# Altium PCB Styx plus panele.PcbDoc
Units mm, origin at the board's own origin, x right, y up, seen from the top; angles counter-clockwise.
Board outline 201.2 x 144 mm, 4 copper layers (Top Layer, Mid-Layer 1, Mid-Layer 2, Bottom Layer); 1 components, 0 nets, 3 pads, 0 vias.
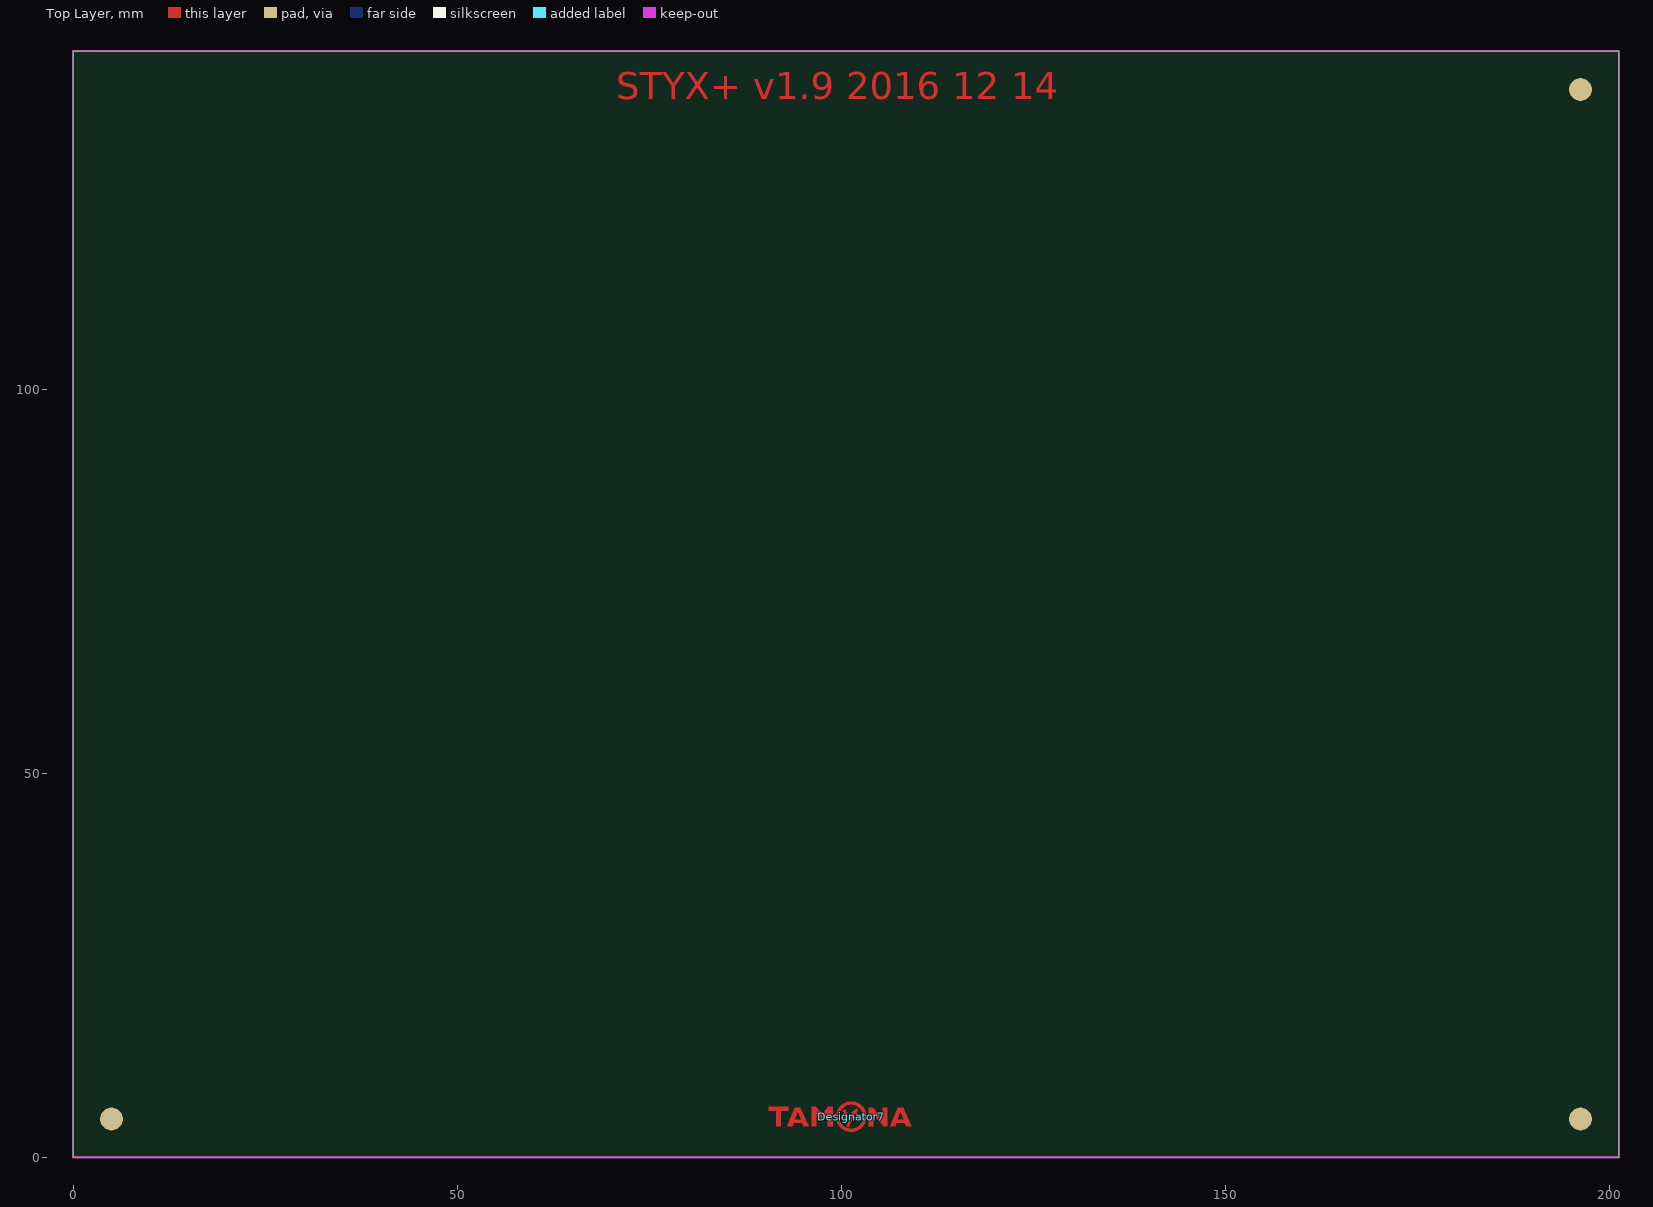
[diagram p0: Top Layer view]
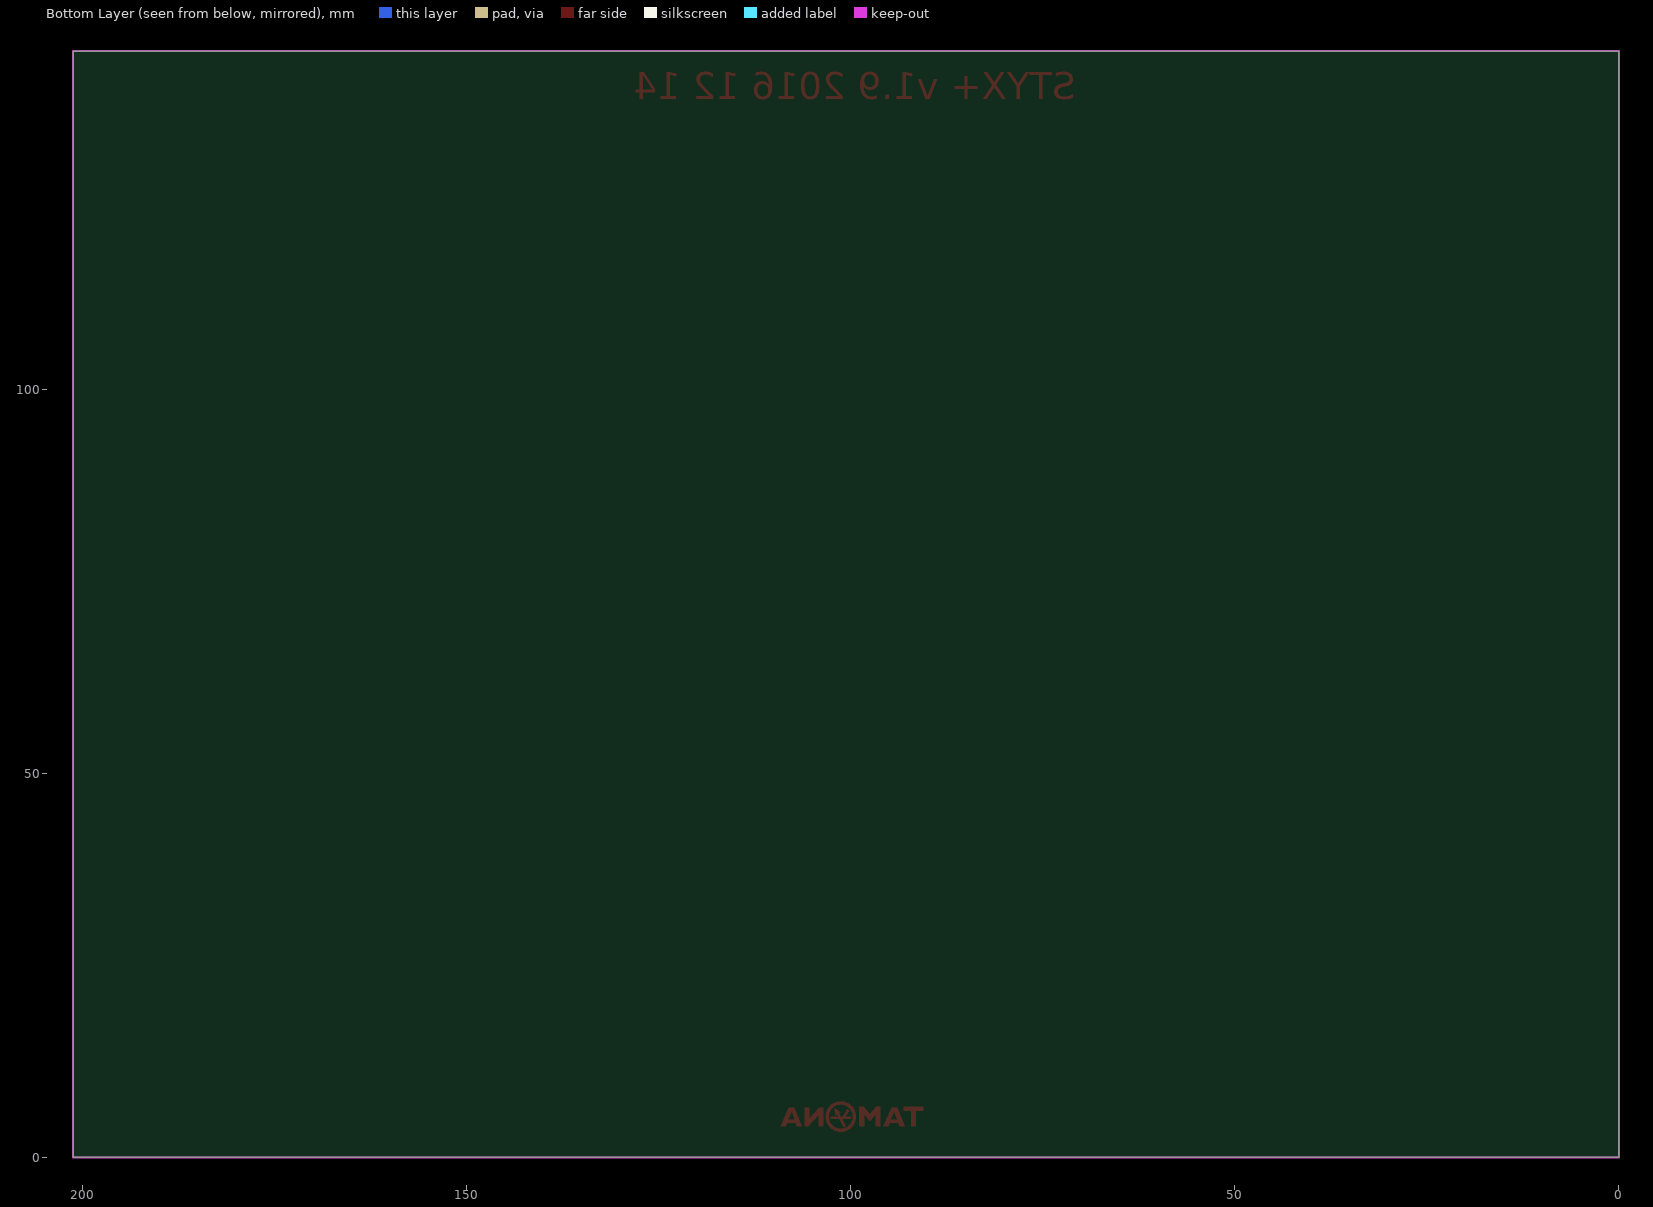
[diagram p1: Bottom Layer view, seen from below]

## Layer stack, top to bottom
Top Solder: solder mask 0.0102, Solder Resist, Dk 3.5
Top Layer: signal copper 0.0356
Dielectric1: core 0.32, FR-4, Dk 4.8
Mid-Layer 1: signal copper 0.0356
Dielectric2: prepreg 0.32, FR-4, Dk 4.8
Mid-Layer 2: signal copper 0.0356
Dielectric3: core 0.32, FR-4, Dk 4.8
Bottom Layer: signal copper 0.0356
Bottom Solder: solder mask 0.0102, Solder Resist, Dk 3.5

## Board outline
0,0 0,144 201.2,144 201.2,0

## Design rules (kind name [scope] priority, off if disabled: settings)
Clearance [All] p1: gap=0.254
PolygonConnect [All] p1: connectstyle=Relief reliefconductorwidth=0.254 reliefentries=4 polygonreliefangle="90 Angle" airgapwidth=0.254
RoutingVias [All] p1: holewidth=0.711 width=1.27 viastyle="Through Hole" minholewidth=0.711 minwidth=1.27 maxholewidth=0.711 maxwidth=1.27
SilkToSolderMaskClearance SilkscreenOverComponentPads [IsPad] p1: minsilkscreentomaskgap=0.254 clearancetoexposedcopper=TRUE
SolderMaskExpansion [All] p1: expansion=0.102
UnpouredPolygon [All] p1: allowunpoured=FALSE
Width [All] p1: maxlimit=2 minlimit=0.254 preferedwidth=0.254
28 further rules are at their usual default settings.

## Components (designator, comment, footprint, x,y, rotation, side; value= is the part's Value field where it differs from the comment)
Designator7 "Comment" TamonaLogo9 101.3,5.3 r0 top

## Footprints (in the part's own frame and the unit in brackets; to place one, negate y for a bottom-side part, rotate by r counter-clockwise, add the part's x,y. Pads: shape width x height; smd on the part's side, far side on the other; paste and mask are expansions set on the pad)
TamonaLogo9 [mm] "18.6 mm x 4.0 mm"
  Top Layer circle w0.444: c-0.019,0.01 r1.777
  Top Layer pour cut-out: 6.026,-0.357 6.777,-0.357 6.383,0.587
  Top Layer pour cut-out: -7.335,-0.358 -6.584,-0.358 -6.977,0.586
  Top Layer region: 0.73,1.022 0.739,0.962 0.696,0.254 0.672,0.213 0.636,0.218 0.519,0.355 0.331,0 1.314,0 1.294,-0.285 0.178,-0.285 -0.388,-1.343 -0.66,-1.238 -0.151,-0.286 -1.349,-0.286 -1.369,0 -0.589,0 -1.094,0.765 -0.891,0.977 -0.247,0 0,0 0.262,0.488 0.072,0.493 0.046,0.508 0.042,0.537 0.063,0.567 0.661,1.03 0.699,1.042
  Top Layer region: 4.697,-1.267 4.197,-1.267 2.842,0.242 2.842,-1.267 2.237,-1.267 2.237,1.171 2.791,1.171 4.097,-0.266 4.097,1.171 4.695,1.171
  Top Layer region: -2.436,-1.267 -3.079,-1.267 -3.079,0.292 -3.763,-0.531 -3.857,-0.531 -4.541,0.292 -4.541,-1.267 -5.184,-1.267 -5.184,1.282 -4.619,1.282 -3.812,0.314 -2.993,1.282 -2.436,1.282
  Top Layer region: -8.243,0.803 -9.163,0.803 -9.163,-1.268 -9.81,-1.268 -9.81,0.803 -10.733,0.803 -10.733,1.282 -8.243,1.282
  Top Layer region: 7.81,-1.265 7.156,-1.265 6.955,-0.782 5.868,-0.782 5.682,-1.265 5.039,-1.265 6.022,1.174 6.727,1.174 hole: 6.383,0.587 6.026,-0.357 6.777,-0.357
  Top Layer region: -5.55,-1.267 -6.205,-1.267 -6.405,-0.784 -7.492,-0.784 -7.678,-1.267 -8.322,-1.267 -7.338,1.172 -6.634,1.172 hole: -6.977,0.586 -7.335,-0.358 -6.584,-0.358

## Free pads (board coordinates)
  round 3 smd: NC(5,5) NC(196.2,139) NC(196.2,5)

## Nets (pads, with @x,y where several pads share a name; then routed paths per layer and width w, separated by ;. In a path a pad name is that pad's centre, name@x,y a point inside that pad or via, vN(x,y) a via of type N, cw(c..) or ccw(c..) an arc to the next point about the centre after c; other vN are vias at no path point)

## Keep-outs
Keep-Out Layer:
  the board outline again, w0.3

## Other copper
Top Layer:
  text "STYX+ v1.9 2016 12 14" at 70.7,137.7 h3.5

## Panel: embedded boards
"Styx plus pcb.PcbDoc" at 0,10, 2 rows x 1 columns, spacing 62 x 100.6, rotation 0
"Styx plus pcb.PcbDoc" at 201.2,134, 2 rows x 1 columns, spacing 62 x 100.6, rotation 180